# Altium PCB AMS.PcbDoc (part 2 of 3)
Units mm, origin at the board's own origin, x right, y up, seen from the top; angles counter-clockwise.
Board outline 150 x 60 mm, 4 copper layers (Top Layer, Layer 1, Layer 2, Bottom Layer), stack 0.603 mm thick; 208 components, 140 nets, 599 pads, 192 vias.
Unrouted connection lines stored in the file: 272.
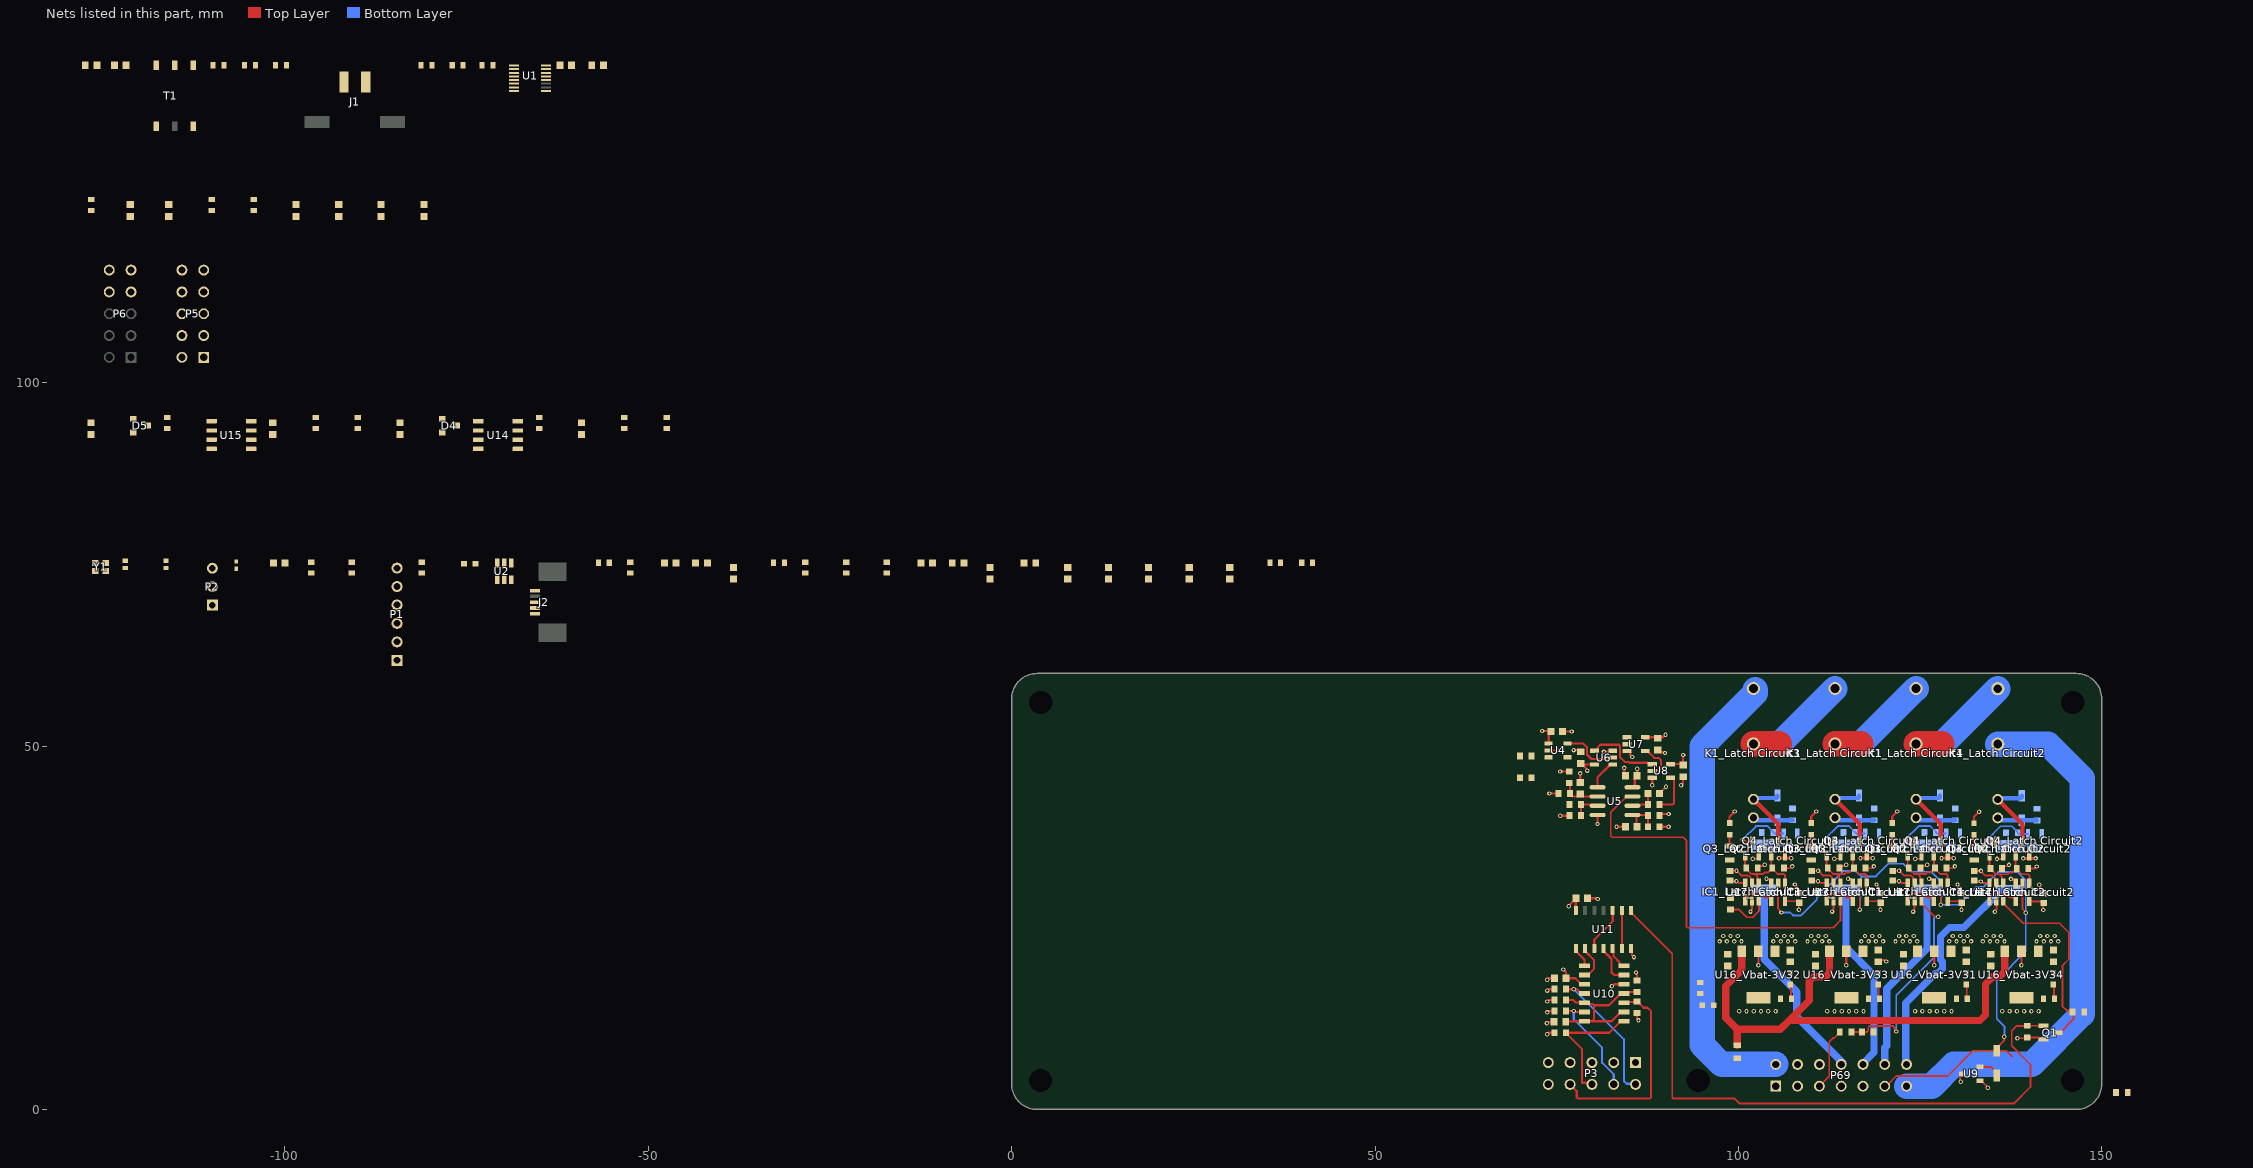
[diagram p3: the nets of this part, all layers, seen from the top]

## Part data
C1 C2 C3 C4 C5 C6 C7 C8 C9 C10 C11 C12 C13 C14 C15 C16 C17 C18 C19 C31 C32 C33 C34 C35 C36 C37 C38 C39 C40 C41_Vbat-3V31 C41_Vbat-3V32 C41_Vbat-3V33 C41_Vbat-3V34 C42_Vbat-3V31 C42_Vbat-3V32 C42_Vbat-3V33 C42_Vbat-3V34: library part Capacitor, "Capacitor", ComponentLink1Description="New link"
C20 C21 C22 C23 C24 C25 C26 C27 C28: "264-4630", LatestRevisionDate=17-Jul-2002, LatestRevisionNote="Re-released for DXP Platform.", PackageDescription="Radial Cap, Thru-Hole; 2 Leads; 0.3 in Pin Spacing", PackageReference=RAD-0.3, Published=8-Jun-2000, Publisher="Altium Limited"
"C43_Latch Circuit1" "C43_Latch Circuit2" "C43_Latch Circuit3" "C43_Latch Circuit4" "C44_Latch Circuit1" "C44_Latch Circuit2" "C44_Latch Circuit3" "C44_Latch Circuit4": library part CMP-2006-03300-2, "CAP CER 0.1UF 50V X7R 0603", Capacitance=100nF, Manufacturer=Kemet, Manufacturer Part Number=C0603X104K5RACTU, Package=C0603-CJ, Temperature="-55°C to +125°C", Temperature Characteristic=X7R, Temperature Coefficient=15%, Temperature Range High=+125°C, Temperature Range Low=-55°C, Tolerance=10%, Voltage=50V, Automotive=No, Category=Cap, ComponentLink2Description=Datasheet, ComponentLink2URL=https://content.kemet.com/datasheets/KEM_C1013_X7R_FT-CAP_SMD.pdf, Device Class L1="Passive Components", Device Class L2=Capacitors, Device Class L3="Ceramic Capacitors", Digikey Description="CAP CER 0.1UF 50V X7R 0603", Height=0.95mm, Ipc Land Pattern Name=CAPC16080X80, Lead Free=Yes, Material=Ceramic, Mouser Description="Capacitor; Ceramic; Cap 0.1uF; Tol+10%; SMT; Flexible Termination; Vol-Rtg 50V; TR", Octopart=https://octopart.com/c0603x104k5ractu-kemet-9145062, RoHS=TRUE, Voltage Rating=50V
D1: "LED BLUE DIFFUSED 0603 SMD", Case/Package=0603, Color=Blue, Forward Voltage=3.2V, Manufacturer="Wurth Electronics", Supplier Part Number 1=710-150060BS55040, Test Current=20mA, ComponentLink1Description=http://www.farnell.com/datasheets/2621640.pdf?src-supplier=Farnell, ComponentLink1URL=http://www.farnell.com/datasheets/2621640.pdf?src-supplier=Farnell, ComponentLink2Description=https://www.we-online.de/web/en/index.php/download/media/07_electronic_components/download_center_1/application_notes_berichte/ano002_leds___the_future_of_horticultural_lighting/ANO002b_EN_LEDs_The_Future_of_Horticultural_Lighting.pdf?src-supplier=Digi-Key, ComponentLink2URL=https://www.we-online.de/web/en/index.php/download/media/07_electronic_components/download_center_1/application_notes_berichte/ano002_leds___the_future_of_horticultural_lighting/ANO002b_EN_LEDs_The_Future_of_Horticultural_Lighting.pdf?src-supplier=Digi-Key, ComponentLink3Description=https://katalog.we-online.de/pbs/datasheet/150060BS55040.pdf?src-supplier=Digi-Key, ComponentLink3URL=https://katalog.we-online.de/pbs/datasheet/150060BS55040.pdf?src-supplier=Digi-Key, ComponentLink4Description=http://www.farnell.com/datasheets/2621640.pdf?src-supplier=Newark, ComponentLink4URL=http://www.farnell.com/datasheets/2621640.pdf?src-supplier=Newark, Dominant Wavelength=470nm, Height=0.5mm, Length=1.6mm, Lens Size=0.8mm, Lens Style=Flat, Lens Transparency=Diffused, Luminous Intensity=80mcd, Manufacturer Part Number=150060BS55040, Mount="Surface Mount", Packaging="Tape and Reel", Pricing 1="1=0.18000, 10=0.16800, 50=0.16800, 100=0.15200, 1000=0.12100, 10000=0.10600 (USD)", RoHS=No, RoHS Compliant=No, Supplier 1=Mouser, Viewing Angle=140°, Width=0.8mm
D2 "D7_Latch Circuit1" "D7_Latch Circuit2" "D7_Latch Circuit3" "D7_Latch Circuit4": library part 1N4148W-7-F, "DIODE GEN PURP 100V 300MA SOD123", Average Rectified Current=300mA, Capacitance=2pF, Current Rating=150mA, Forward Voltage=1.25V, Manufacturer 1=Diodes, Max Forward Surge Current (Ifsm)=2A, Max Operating Temperature=150°C, Max Repetitive Reverse Voltage (Vrrm)=100V, Min Operating Temperature=-65°C, Package Quantity=3000, Peak Reverse Current=1uA, Power Dissipation=400mW, Supplier Part Number 1=1N4148W-FDIDKR-ND, Voltage Rating (DC)=75V, ComponentLink1Description=https://datasheet.ciiva.com/911/ds30086-911734.pdf?src-supplier=Digi-Key, ComponentLink1URL=https://datasheet.ciiva.com/911/ds30086-911734.pdf?src-supplier=Digi-Key, ComponentLink2Description=https://datasheet.ciiva.com/911/ds30086-911735.pdf?src-supplier=Digi-Key, ComponentLink2URL=https://datasheet.ciiva.com/911/ds30086-911735.pdf?src-supplier=Digi-Key, ComponentLink3Description=https://datasheet.ciiva.com/911/ds30086-911736.pdf?src-supplier=Digi-Key, ComponentLink3URL=https://datasheet.ciiva.com/911/ds30086-911736.pdf?src-supplier=Digi-Key, ComponentLink4Description=https://datasheet.ciiva.com/8300/ds30086-8300392.pdf?src-supplier=Avnet, ComponentLink4URL=https://datasheet.ciiva.com/8300/ds30086-8300392.pdf?src-supplier=Avnet, ComponentLink5Description=https://datasheet.ciiva.com/25919/ds30086-25919609.pdf?src-supplier=Avnet+Europe, ComponentLink5URL=https://datasheet.ciiva.com/25919/ds30086-25919609.pdf?src-supplier=Avnet+Europe, ComponentLink6Description=https://datasheet.ciiva.com/22695/1915529-22695239.pdf?src-supplier=Element14, ComponentLink6URL=https://datasheet.ciiva.com/22695/1915529-22695239.pdf?src-supplier=Element14, ComponentLink7Description=https://datasheet.ciiva.com/1179/1915529-1179304.pdf?src-supplier=Element14, ComponentLink7URL=https://datasheet.ciiva.com/1179/1915529-1179304.pdf?src-supplier=Element14, ComponentLink8Description=https://datasheet.ciiva.com/4435/ds30086-4435128.pdf?src-supplier=Mouser, ComponentLink8URL=https://datasheet.ciiva.com/4435/ds30086-4435128.pdf?src-supplier=Mouser, ComponentLink9Description=https://datasheet.ciiva.com/15219/getdatasheetpartid-110030-15219548.pdf?src-supplier=Verical, ComponentLink9URL=https://datasheet.ciiva.com/15219/getdatasheetpartid-110030-15219548.pdf?src-supplier=Verical, ComponentLink10Description=https://datasheet.ciiva.com/8303/ds30086-8303197.pdf?src-supplier=Avnet, ComponentLink10URL=https://datasheet.ciiva.com/8303/ds30086-8303197.pdf?src-supplier=Avnet, Contact Plating=Tin,Matte, Element Configuration=Single, Forward Current=150mA, Height=1.25mm, Lead Free="Lead Free", Length=2.85mm, Manufacturer Part Number 1=1N4148W-7-F, Max Reverse Voltage (DC)=100V, Max Surge Current=2A, Mount="Surface Mount", Number of Pins=2, Output Current=150mA, Packaging="Tape and Reel", Peak Non-Repetitive Surge Current=2A, Polarity=Standard, Power Rating=400mW, Pricing 1="1=0.16000, 10=0.14600, 25=0.13880, 100=0.06110, 250=0.05868, 500=0.04800, 1000=0.03333 (USD)", Radiation Hardening=No, REACH SVHC="No SVHC", Recovery Time=4ns, Reverse Recovery Time=4ns, RoHS=Yes, Stock 1=3523690, Supplier 1=Digi-Key, Voltage=100V, Weight=0.000353oz, Width=1.7mm
D3 "D8_Latch Circuit1" "D8_Latch Circuit2" "D8_Latch Circuit3" "D8_Latch Circuit4": "LED RED DIFFUSED 0603 SMD", Case Code (Imperial)=0603, Case Code (Metric)=1608, Color=Red, Forward Voltage=2V, Manufacturer="Wurth Electronics", Supplier Part Number 1=710-150060SS55040, Test Current=20mA, Case/Package=0603, Category=LEDs, Dominant Wavelength=630nm, Height=0.5mm, Length=1.6mm, Lens Size=0.8mm, Lens Style=Flat, Lens Transparency=Diffused, Luminous Intensity=70mcd, Manufacturer Part Number=150060SS55040, Mount="Surface Mount", Packaging="Tape and Reel", Pricing 1="1=0.18000, 10=0.16800, 50=0.16800, 100=0.15200, 1000=0.12100, 10000=0.10600 (USD)", RoHS=No, RoHS Compliant=No, Stock 1=17006, Supplier 1=Mouser, Viewing Angle=140°, Width=0.8mm
D4 D5: library part CMP-07200-000005-1, "TVS DIODE 32V 66V SOT23-3", Breakdown Voltage=35.6V, Capacitance=30pF, Clamping Voltage=66V, Manufacturer="ON Semiconductor", Max Junction Temp=+150°C, Package=318-08, Peak Pulse Current=8A, Peak Pulse Power=350W, Reverse Standoff Voltage=32V, Temperature="-55°C to +150°C", Temperature Range Low=-55°C, Automotive=Yes, Automotive Grade="Grade 0", Category=Diode, ComponentLink2Description=Datasheet, ComponentLink2URL=https://www.onsemi.com/pub/Collateral/NUP3105L-D.PDF, Device Class L1="Circuit Protection", Device Class L2="TVS Diodes", Device Class L3=unset, Digikey Description="TVS DIODE 32V 66V SOT23-3", Direction=Bidirectional, Footprint Url=https://www.onsemi.com/pub/Collateral/318-08.PDF, Height=1.11mm, Lead Free=Yes, Manufacturer Part Number=SZNUP3105LT3G, Mouser Description="32V Dual Line CAN Bus Protector in SOT-23 AEC-Q 24 V CAN Bus Protector in SOT-23", Number of Channels=2, Octopart=https://octopart.com/sznup3105lt3g-on+semiconductor-54318507, RoHS=TRUE, Standoff Height=0.01mm, Temperature Range High=+150°C
D6_Vbat-3V31 D6_Vbat-3V32 D6_Vbat-3V33 D6_Vbat-3V34: "LED GREEN DIFFUSED 0603 SMD", Case Code (Imperial)=0603, Case Code (Metric)=1608, Color=Green, Forward Voltage=3.2V, Manufacturer="Wurth Electronics", Supplier Part Number 1=710-150060GS55040, Test Current=20mA, Case/Package=0603, Category=LEDs, ComponentLink1Description=http://www.farnell.com/datasheets/2621642.pdf?src-supplier=Farnell, ComponentLink1URL=http://www.farnell.com/datasheets/2621642.pdf?src-supplier=Farnell, ComponentLink2Description=http://katalog.we-online.de/pbs/datasheet/150060GS55040.pdf?src-supplier=Digi-Key, ComponentLink2URL=http://katalog.we-online.de/pbs/datasheet/150060GS55040.pdf?src-supplier=Digi-Key, ComponentLink3Description=https://www.we-online.de/web/en/index.php/download/media/07_electronic_components/download_center_1/application_notes_berichte/ano002_leds___the_future_of_horticultural_lighting/ANO002b_EN_LEDs_The_Future_of_Horticultural_Lighting.pdf?src-supplier=Digi-Key, ComponentLink3URL=https://www.we-online.de/web/en/index.php/download/media/07_electronic_components/download_center_1/application_notes_berichte/ano002_leds___the_future_of_horticultural_lighting/ANO002b_EN_LEDs_The_Future_of_Horticultural_Lighting.pdf?src-supplier=Digi-Key, ComponentLink4Description=https://katalog.we-online.de/pbs/datasheet/150060GS55040.pdf?src-supplier=Digi-Key, ComponentLink4URL=https://katalog.we-online.de/pbs/datasheet/150060GS55040.pdf?src-supplier=Digi-Key, ComponentLink5Description=http://www.farnell.com/datasheets/2621642.pdf?src-supplier=Newark, ComponentLink5URL=http://www.farnell.com/datasheets/2621642.pdf?src-supplier=Newark, Dominant Wavelength=525nm, Height=0.5mm, Length=1.6mm, Lens Size=0.8mm, Lens Style=Flat, Lens Transparency=Diffused, Luminous Intensity=430mcd, Manufacturer Part Number=150060GS55040, Mount="Surface Mount", Packaging="Cut Tape", Pricing 1="1=0.23000, 10=0.21000, 50=0.21000, 100=0.19000, 1000=0.15200, 10000=0.13200 (USD)", RoHS=No, RoHS Compliant=No, Stock 1=3998, Supplier 1=Mouser, Viewing Angle=140°, Width=0.8mm
F1: "Surface Mount Fuses 32V .500A Case 0603 Protector Slim"
"IC1_Latch Circuit1" "IC1_Latch Circuit2" "IC1_Latch Circuit3" "IC1_Latch Circuit4": "Integrated Circuit", Manufacturer_Name="Texas Instruments", Datasheet Link=http://www.ti.com/general/docs/suppproductinfo.tsp?distId=10&gotoUrl=http%3A%2F%2Fwww.ti.com%2Flit%2Fgpn%2Fsn74lvc1g373, Height=1.45mm, Manufacturer_Part_Number=74LVC1G373DBVRE4
J1: "CONN HEADER 3MM 2POS R/A TIN SMD", Package=None, Availability=Unavailable, MF="{'manufacturer': u'TE Connectivity'}", MP=2-1445057-2, Price=None
J2: library part CMP-2000-07376-1, "Mini-B Connector, SMT Mount Receptacle Meeting Requirement of USB 2.0 Standard, 5 V, 1 A, -30 to 75 degC, 5-Pin SMD, RoHS, Tape and Reel", Current Rating (Max)=1A, Manufacturer="Hirose Electric", Operating Temp Range=-30Cto75C, Operating Temperature Max Deg. C=75C, Operating Temperature Min Deg. C=-30C, Package Description="5-Pin Surface Mount Device, Body 7.7 x 7 mm, Pitch 0.8 mm", Voltage Rating Max=5VAC, Body Orientation=RightAngle, Contact Material=CopperAlloy, Contact Plating=Gold, Datasheet URL=https://datasheet.ciiva.com/4598/e24000153-34949-4598883.pdf, Datasheet Version=04/2008, DELETED=Compliant, Gender=RCP, Housing Material=Synthetic, Manufacturer URL=https://www.hirose.com, Mounting Style=ThroughHole, Mounting Technology=SurfaceMount, Number of Contacts=5POS, Number of Ports=1Port, Number of Terminals=5, Package Reference=UX60SC-MB-5ST(80), Packaging=TapeandReel, Pitch (mm)=0.8mm, Product Depth (mm)=7mm, Product Diameter (mm)=NotRequiredmm, Product Height (mm)=3.95mm, Product Length (mm)=7.7mm, Termination Method=Solder, Type=Mini-USB
"K1_Latch Circuit1" "K1_Latch Circuit2" "K1_Latch Circuit3" "K1_Latch Circuit4": "Relay"
P1: library part "Header 6", "Header, 6-Pin", LatestRevisionDate=17-Jul-2002, LatestRevisionNote="Re-released for DXP Platform.", Publisher="Altium Limited"
P2: library part "Header 3", "Header, 3-Pin", Manufacturer=-, Mfg No.=-, Notes=-, Suppl. Link/No.=-, Supplier=Digikey
P3 P5 P6: "Connector", Manufacturer_Name="TE Connectivity", Mouser Part Number=571-4-794632-0, Datasheet Link=https://www.mouser.com/ProductDetail/TE-Connectivity-AMP/4-794632-0?qs=Rd%252BN518myCyGOpGRvqIhCg%3D%3D, Height=9.44mm, Manufacturer_Part_Number=4-794632-0, Mouser Price/Stock=https://www.mouser.co.uk/ProductDetail/TE-Connectivity-AMP/4-794632-0?qs=Rd%252BN518myCyGOpGRvqIhCg%3D%3D
P69: "Micro MATE-N-LOK, Rectangular Power Connectors, Header, Plug, Wire-to-Board, 14 Position"
Q1 "Q2_Latch Circuit1" "Q2_Latch Circuit2" "Q2_Latch Circuit3" "Q2_Latch Circuit4" "Q3_Latch Circuit1" "Q3_Latch Circuit2" "Q3_Latch Circuit3" "Q3_Latch Circuit4" "Q4_Latch Circuit1" "Q4_Latch Circuit2" "Q4_Latch Circuit3" "Q4_Latch Circuit4": library part CMP-1259-00087-1, "N-Channel Trench MOSFET, 60 V, 0.36 A, -55 to 150 degC, 3-Pin SOT23, Tape and Reel", Manufacturer="NXP Semiconductors", Automotive Qualified=Y, Channel Type=N, Code_JEDEC=TO-236AB, ComponentLink1Description="Manufacturer URL", ComponentLink1URL=http://www.nxp.com/, ComponentLink2Description=Datasheet, ComponentLink2URL=http://www.nxp.com/documents/data_sheet/BSS138BK.pdf, ComponentLink3Description="Package Specification", ComponentLink3URL=http://www.nxp.com/documents/outline_drawing/sot023_po.pdf, DatasheetVersion="Rev. 1", ID [max] (A)=0.36, IDM [max] (A)=1.2, Mounting Technology="Surface Mount", PackageDescription="3-Pin Small Outline Transistor Package, Body 2.9 x 1.3 mm, Pitch 0.95 mm", PackageReference=SOT23, PackageVersion="06-03-16, 03/2006", Packing="Tape & Reel", PartNumber=BSS138BK,215, VDS [max] (V)=60, VGSth [typ] (V)=1.1
R3 R5 R6: library part Resistor, "Resistor"
R4: "RB2"
R7 R8 R9 R10 R11 R12 R13 R14: library part Resistor, "Voltage divider"
R19 R24: "CRCW06033K24FKEA", LatestRevisionDate=17-Jul-2002, LatestRevisionNote="Re-released for DXP Platform.", PackageDescription="Axial Device, Thru-Hole; 2 Leads; 0.3 in Pin Spacing", PackageReference=AXIAL-0.3, Published=8-Jun-2000, Publisher="Altium Limited"
R20 R21 R22 R23 R26: "169-4216", LatestRevisionDate=17-Jul-2002, LatestRevisionNote="Re-released for DXP Platform.", PackageDescription="Axial Device, Thru-Hole; 2 Leads; 0.3 in Pin Spacing", PackageReference=AXIAL-0.3, Published=8-Jun-2000, Publisher="Altium Limited"
R25: "120-842", LatestRevisionDate=17-Jul-2002, LatestRevisionNote="Re-released for DXP Platform.", PackageDescription="Axial Device, Thru-Hole; 2 Leads; 0.3 in Pin Spacing", PackageReference=AXIAL-0.3, Published=8-Jun-2000, Publisher="Altium Limited"
R27 R28 R30: "679-0260", LatestRevisionDate=17-Jul-2002, LatestRevisionNote="Re-released for DXP Platform.", PackageDescription="Axial Device, Thru-Hole; 2 Leads; 0.3 in Pin Spacing", PackageReference=AXIAL-0.3, Published=8-Jun-2000, Publisher="Altium Limited"
R29 R31 R32 R37 R38 "R51_Latch Circuit1" "R51_Latch Circuit2" "R51_Latch Circuit3" "R51_Latch Circuit4" "R52_Latch Circuit1" "R52_Latch Circuit2" "R52_Latch Circuit3" "R52_Latch Circuit4" "R53_Latch Circuit1" "R53_Latch Circuit2" "R53_Latch Circuit3" "R53_Latch Circuit4" "R54_Latch Circuit1" "R54_Latch Circuit2" "R54_Latch Circuit3" "R54_Latch Circuit4" R?: library part RC0805JR-0710KL, "10k E0805 1% 1/8W", Case Code (Imperial)=0805, Case Code (Metric)=2012, Max Operating Temperature=155°C, Min Operating Temperature=-55°C, Power Rating=125mW, Resistance=10kR, Supplier Part Number 1=311-10KARCT-ND, Temperature Coefficient=100ppm/°C, Tolerance=5%, Voltage Rating=150V, Case/Package=0805, ComponentLink1Description=https://datasheet.ciiva.com/7941/444164-7941870.pdf?src-supplier=Element14, ComponentLink1URL=https://datasheet.ciiva.com/7941/444164-7941870.pdf?src-supplier=Element14, ComponentLink2Description=https://datasheet.ciiva.com/7941/444164-7941871.pdf?src-supplier=Element14, ComponentLink2URL=https://datasheet.ciiva.com/7941/444164-7941871.pdf?src-supplier=Element14, ComponentLink3Description=https://datasheet.ciiva.com/7983/444164-7983765.pdf?src-supplier=Element14, ComponentLink3URL=https://datasheet.ciiva.com/7983/444164-7983765.pdf?src-supplier=Element14, Composition="Thick Film", Contact Plating=Tin, Depth=1.25mm, Height=0.5mm, Lead Free="Lead Free", Length=2mm, Military Standard=Not, Packaging="Tape and Reel", Radiation Hardening=No, REACH SVHC=Unknown, RoHS=Yes, Supplier 1=Digi-Key, Termination=SMD/SMT, Width=1.25mm
R33 R34 R35 R36: library part RC0805FR-071K58L, "1.58k 0805 1% 1/8W", Case Code (Imperial)=0805, Case Code (Metric)=2012, Max Operating Temperature=155°C, Max Power Dissipation=125mW, Min Operating Temperature=-55°C, Package Quantity=1, Resistance=1.58kR, Supplier Part Number 1=311-1.58KCRCT-ND, Temperature Coefficient=100ppm/°C, Tolerance=1%, Voltage Rating=150V, Case/Package=0805, ComponentLink1Description=https://datasheet.ciiva.com/2457/pyu-r-int-thick-7-2457440.pdf?src-supplier=Digi-Key, ComponentLink1URL=https://datasheet.ciiva.com/2457/pyu-r-int-thick-7-2457440.pdf?src-supplier=Digi-Key, ComponentLink2Description=https://datasheet.ciiva.com/2457/pyu-r-int-thick-7-2457441.pdf?src-supplier=Digi-Key, ComponentLink2URL=https://datasheet.ciiva.com/2457/pyu-r-int-thick-7-2457441.pdf?src-supplier=Digi-Key, ComponentLink3Description=https://datasheet.ciiva.com/2457/pyu-r-int-thick-7-2457442.pdf?src-supplier=Digi-Key, ComponentLink3URL=https://datasheet.ciiva.com/2457/pyu-r-int-thick-7-2457442.pdf?src-supplier=Digi-Key, ComponentLink4Description=https://datasheet.ciiva.com/17082/rc0805-17082718.pdf?src-supplier=Future+Electronics, ComponentLink4URL=https://datasheet.ciiva.com/17082/rc0805-17082718.pdf?src-supplier=Future+Electronics, Composition="Thick Film", Contact Plating=Tin, Depth=1.25mm, Features="Moisture Resistant", Height=0.024inch, Lead Free="Lead Free", Length=0.079inch, Military Standard=Not, Number of Terminations=2, Packaging="Tape and Reel", Power Rating=125mW, Radiation Hardening=No, RoHS=Yes, Supplier 1=Digi-Key, Termination=SMD/SMT, Voltage Rating (DC)=150V, Width=0.049inch
"R55_Latch Circuit1" "R55_Latch Circuit2" "R55_Latch Circuit3" "R55_Latch Circuit4": library part CRCW2512649RFKEG, "RES SMD 649 OHM 1% 1W 2512", Case Code (Imperial)=2512, Case Code (Metric)=6432, Manufacturer 1="Vishay Dale", Max Operating Temperature=155°C, Max Power Dissipation=1W, Min Operating Temperature=-55°C, Package Quantity=10, Resistance=649R, Supplier Part Number 1=541-649AFCT-ND, Temperature Coefficient=100ppm/°C, Tolerance=1%, Voltage Rating (DC)=500V, Case/Package=2512, ComponentLink1Description=https://datasheet.ciiva.com/2479/dcrcwe3-2479296.pdf?src-supplier=Digi-Key, ComponentLink1URL=https://datasheet.ciiva.com/2479/dcrcwe3-2479296.pdf?src-supplier=Digi-Key, ComponentLink2Description=https://datasheet.ciiva.com/2479/dcrcwe3-2479297.pdf?src-supplier=Digi-Key, ComponentLink2URL=https://datasheet.ciiva.com/2479/dcrcwe3-2479297.pdf?src-supplier=Digi-Key, ComponentLink3Description=https://datasheet.ciiva.com/2479/dcrcwe3-2479298.pdf?src-supplier=Digi-Key, ComponentLink3URL=https://datasheet.ciiva.com/2479/dcrcwe3-2479298.pdf?src-supplier=Digi-Key, Composition="Thick Film", Features="Automotive AEC-Q200", Height=0.028inch, Lead Free="Lead Free", Length=0.248inch, Manufacturer Part Number 1=CRCW2512649RFKEG, Number of Terminations=2, Packaging="Tape and Reel", Pricing 1="1=0.38000, 10=0.31800, 100=0.12420, 1000=0.05198 (USD)", RoHS=Yes, Stock 1=2166, Supplier 1=Digi-Key, Width=0.124inch
"R56_Latch Circuit1" "R56_Latch Circuit2" "R56_Latch Circuit3" "R56_Latch Circuit4": "RES SMD 649 OHM 1% 1W 2512", Case Code (Imperial)=2512, Case Code (Metric)=6432, Manufacturer 1="Vishay Dale", Max Operating Temperature=155°C, Max Power Dissipation=1W, Min Operating Temperature=-55°C, Package Quantity=10, Resistance=649R, Supplier Part Number 1=541-649AFCT-ND, Temperature Coefficient=100ppm/°C, Tolerance=1%, Voltage Rating (DC)=500V, Case/Package=2512, ComponentLink1Description=https://datasheet.ciiva.com/2479/dcrcwe3-2479296.pdf?src-supplier=Digi-Key, ComponentLink1URL=https://datasheet.ciiva.com/2479/dcrcwe3-2479296.pdf?src-supplier=Digi-Key, ComponentLink2Description=https://datasheet.ciiva.com/2479/dcrcwe3-2479297.pdf?src-supplier=Digi-Key, ComponentLink2URL=https://datasheet.ciiva.com/2479/dcrcwe3-2479297.pdf?src-supplier=Digi-Key, ComponentLink3Description=https://datasheet.ciiva.com/2479/dcrcwe3-2479298.pdf?src-supplier=Digi-Key, ComponentLink3URL=https://datasheet.ciiva.com/2479/dcrcwe3-2479298.pdf?src-supplier=Digi-Key, Composition="Thick Film", Features="Automotive AEC-Q200", Height=0.028inch, Lead Free="Lead Free", Length=0.248inch, Manufacturer Part Number 1=CRCW2512649RFKEG, Number of Terminations=2, Packaging="Tape and Reel", Pricing 1="1=0.38000, 10=0.31800, 100=0.12420, 1000=0.05198 (USD)", RoHS=Yes, Stock 1=2166, Supplier 1=Digi-Key, Width=0.124inch
T1: "BMS XFORMER 1-CH 1000V AECQ +125", Inductance=150uH, Manufacturer=Bourns, Max Operating Temperature=125°C, Min Operating Temperature=-40°C, Supplier Part Number 1=1802382, Category=Transformers, ComponentLink1Description=https://www.bourns.com/docs/Product-Datasheets/SM91502AL.pdf?src-supplier=Digi-Key, ComponentLink1URL=https://www.bourns.com/docs/Product-Datasheets/SM91502AL.pdf?src-supplier=Digi-Key, Manufacturer Part Number=SM91502ALE, Mount="Surface Mount", Packaging="Cut Tape", Pricing 1="800=2.35100 (USD)", RoHS=Yes, Stock 1=1, Supplier 1=RSComponents, Turns Ratio=1:1
U1: "IC COMM INTERFACE ISOSPI 16MSOP", Case/Package=MSOP, Manufacturer="Analog Devices / Linear Technology", Max Operating Temperature=125°C, Max Supply Voltage=5.5V, Min Operating Temperature=-40°C, Min Supply Voltage=2.7V, Package=None, Package Quantity=37, Supplier Part Number 1=584-LTC6820HMS#PBF, Availability=Unavailable, Category="Interface ICs", ComponentLink1Description=https://datasheet.ciiva.com/22649/1730562-22649441.pdf?src-supplier=Element14, ComponentLink1URL=https://datasheet.ciiva.com/22649/1730562-22649441.pdf?src-supplier=Element14, ComponentLink2Description=https://datasheet.ciiva.com/6573/42317-6573703.pdf?src-supplier=Digi-Key, ComponentLink2URL=https://datasheet.ciiva.com/6573/42317-6573703.pdf?src-supplier=Digi-Key, ComponentLink3Description=https://datasheet.ciiva.com/22767/1730562-22767675.pdf?src-supplier=Farnell, ComponentLink3URL=https://datasheet.ciiva.com/22767/1730562-22767675.pdf?src-supplier=Farnell, Interface=SPI, Manufacturer Part Number=LTC6820HMS#PBF, MF="{'manufacturer': u'Analog Devices Inc.'}", MP=LTC6820HMS#PBF, Number of Pins=16, Packaging=Rail/Tube, Price=None, Pricing 1="1=6.860000, 10=6.160000, 25=5.820000, 50=5.820000, 100=5.040000, 1000=4.780000, 10000=4.780000 (USD)", REACH SVHC="No SVHC", RoHS=Yes, RoHS Compliant=Yes, Series=isoSPI, Supplier 1=Mouser
U2: "TVS DIODE 5.25V 17V SOT23-6", Breakdown Voltage=6V, Capacitance=3.5pF, Case/Package=SOT-23, Clamping Voltage=17V, Leakage Current=150nA, Manufacturer=STMicroelectronics, Max Operating Temperature=125°C, Min Operating Temperature=-40°C, Operating Supply Voltage=1.1V, Package Quantity=3000, Peak Pulse Current=5A, Power Line Protection=Yes, Reverse Standoff Voltage=5.25V, Supplier Part Number 1=6247693, Test Current=1mA, Working Voltage=5V, Category="TVS Diodes", Clamping Voltage-Max=17V, ComponentLink1Description=https://datasheet.ciiva.com/1268/1690354-1268384.pdf?src-supplier=Element14, ComponentLink1URL=https://datasheet.ciiva.com/1268/1690354-1268384.pdf?src-supplier=Element14, ComponentLink2Description=https://datasheet.ciiva.com/4508/cd00050750-113117-4508433.pdf?src-supplier=Mouser, ComponentLink2URL=https://datasheet.ciiva.com/4508/cd00050750-113117-4508433.pdf?src-supplier=Mouser, ComponentLink3Description=https://datasheet.ciiva.com/15143/getdatasheetpartid-148465-15143789.pdf?src-supplier=Verical, ComponentLink3URL=https://datasheet.ciiva.com/15143/getdatasheetpartid-148465-15143789.pdf?src-supplier=Verical, ComponentLink4Description=https://datasheet.ciiva.com/26787/usblc6-2sc6-26787908.pdf?src-supplier=IIIC, ComponentLink4URL=https://datasheet.ciiva.com/26787/usblc6-2sc6-26787908.pdf?src-supplier=IIIC, ComponentLink5Description=https://datasheet.ciiva.com/16200/cd00050750-16200026.pdf?src-supplier=Future+Electronics, ComponentLink5URL=https://datasheet.ciiva.com/16200/cd00050750-16200026.pdf?src-supplier=Future+Electronics, ComponentLink6Description=https://datasheet.ciiva.com/41444/001184109-da-01-en-ic-esd-protecti-usblc6-2sc6-sot-23-6-stm-41444156.pdf?src-supplier=Conrad, ComponentLink6URL=https://datasheet.ciiva.com/41444/001184109-da-01-en-ic-esd-protecti-usblc6-2sc6-sot-23-6-stm-41444156.pdf?src-supplier=Conrad, Contact Plating=Tin,Matte, Data Rate=480Mbps, Depth=1.75mm, Direction=Unidirectional,Bidirectional, Element Configuration=Dual, ESD Protection=Yes, Height=1.3mm, Lead Free="Lead Free", Length=3.05mm, Manufacturer Part Number=USBLC6-2SC6, Max Breakdown Voltage=6V, Max Reverse Leakage Current=150nA, Min Breakdown Voltage=6V, Mount="Surface Mount", Number of Bidirectional Channels=2, Number of Channels=2, Number of Elements=1, Number of Pins=6, Packaging="Tape and Reel", Polarity=Unidirectional,Bidirectional, Pricing 1="10=0.61400, 50=0.57700, 100=0.54700, 250=0.51600, 500=0.49000 (USD)", Radiation Hardening=No, REACH SVHC="No SVHC", Reverse Breakdown Voltage=6V, RoHS=Yes, RoHS Compliant=Yes, Series=USB, Stock 1=1, Supplier 1=RSComponents, Termination=SMD/SMT, Width=1.75mm
U4: library part CMP-04872-000003-1, "IC RECEIVER 0/1 SOT23-5", Ambient Temperature Range High=+85°C, Ambient Temperature Range Low=-40°C, Manufacturer="Texas Instruments", Max Supply Voltage=3.6V, Min Supply Voltage=2.4V, Nominal Supply Current=2-5.5mA, Package=DBV0005A, Temperature="-40°C to +85°C", Automotive=No, Category=IC, ComponentLink2Description=Datasheet, ComponentLink2URL=http://www.ti.com/lit/ds/symlink/sn65lvdt2.pdf, Device Class L1="Integrated Circuits (ICs)", Device Class L2="Interface ICs", Device Class L3=unset, Digikey Description="IC RECEIVER 0/1 SOT23-5", Height=1.45mm, Interface=LVDS,LVTTL, Lead Free=Yes, Manufacturer Part Number=SN65LVDT2DBVT, Mouser Description="LVDS Interface IC Dual LVDS", Octopart=https://octopart.com/sn65lvdt2dbvt-texas+instruments-712102, RoHS=TRUE, Standoff Height=0mm, Temperature Range High=+85°C, Temperature Range Low=-40°C
U5: library part CMP-0187-00180-2, "Push-Pull Output Sub-Microamp Comparator, 8-Pin SOIC, Industrial Temperature", Code_IPC=SOIC127P600-8, Code_JEDEC=MS-012, ComponentLink1Description="Manufacturer URL", ComponentLink1URL=http://www.microchip.com/, ComponentLink2Description=Datasheet, ComponentLink2URL=http://ww1.microchip.com/downloads/en/DeviceDoc/21696H.pdf, ComponentLink3Description="Package Specification", ComponentLink3URL=http://www.microchip.com/stellent/groups/techpub_sg/documents/packagingspec/en012702.pdf, DatasheetVersion="revH, Dec-2011", PackageDescription="8-Lead Plastic Small Outline (SN) - Narrow, 3.90mm Body [SOIC]", PackageReference=SOIC-SN8, PackageVersion="revBB, Aug-2009", RevisionNote="URLs added. DatasheetVersion updated."
U6: "Integrated Circuit", Manufacturer_Name="Texas Instruments", Mouser2 Part Number=595-SN74LVC08MDBVREP, Datasheet Link=http://www.ti.com/lit/gpn/sn74lvc1g08-ep, Height=1.45mm, Manufacturer_Part_Number=SN74LVC1G08MDBVREP, Mouser2 Price/Stock=https://www.mouser.com/Search/Refine.aspx?Keyword=595-SN74LVC08MDBVREP
U7: library part NC7S02M5X, "NAND GATEEE", Manufacturer_Name="ON Semiconductor", Height=1.25mm, Manufacturer_Part_Number=NC7S02M5X
U8 "U17_Latch Circuit1" "U17_Latch Circuit2" "U17_Latch Circuit3" "U17_Latch Circuit4": "OR GATEEEE", Manufacturer_Name="ON Semiconductor", Datasheet Link=https://componentsearchengine.com/Datasheets/2/NC7S32M5X.pdf, Height=1.1mm, Manufacturer_Part_Number=NC7S32M5X
U9: library part MAX810TTRG, "Integrated Circuit", Manufacturer_Name="ON Semiconductor", Datasheet Link=http://www.onsemi.com/pub/Collateral/MAX809S-D.PDF, Height=1.11mm, Manufacturer_Part_Number=MAX810TTRG
U10: "IC VOLT COMPARATOR QUAD 14-SOIC", Case/Package=SOIC, Input Bias Current=5pA, Input Offset Voltage (Vos)=5mV, Manufacturer 1="Texas Instruments", Max Operating Temperature=125°C, Max Power Dissipation=950mW, Max Supply Current=80uA, Max Supply Voltage=16V, Min Operating Temperature=-40°C, Min Supply Voltage=3V, Operating Supply Voltage=5V, Output Current=20mA, Package Quantity=2500, Power Supply Rejection Ratio (PSRR)=85dB, Quiescent Current=175uA, Supplier Part Number 1=296-23711-1-ND, Common Mode Rejection Ratio=84dB, ComponentLink1Description=https://datasheet.ciiva.com/1828/tlc3704-q1-1828544.pdf?src-supplier=Digi-Key, ComponentLink1URL=https://datasheet.ciiva.com/1828/tlc3704-q1-1828544.pdf?src-supplier=Digi-Key, ComponentLink2Description=https://datasheet.ciiva.com/4464/sgls191a-104586-4464808.pdf?src-supplier=Mouser, ComponentLink2URL=https://datasheet.ciiva.com/4464/sgls191a-104586-4464808.pdf?src-supplier=Mouser, ComponentLink3Description=https://datasheet.ciiva.com/15131/getdatasheetpartid-331461-15131244.pdf?src-supplier=Verical, ComponentLink3URL=https://datasheet.ciiva.com/15131/getdatasheetpartid-331461-15131244.pdf?src-supplier=Verical, ComponentLink4Description=https://datasheet.ciiva.com/14391/tlc3704-q1-14391948.pdf?src-supplier=Avnet, ComponentLink4URL=https://datasheet.ciiva.com/14391/tlc3704-q1-14391948.pdf?src-supplier=Avnet, ComponentLink5Description=https://datasheet.ciiva.com/1828/tlc3704-q1-1828542.pdf?src-supplier=Digi-Key, ComponentLink5URL=https://datasheet.ciiva.com/1828/tlc3704-q1-1828542.pdf?src-supplier=Digi-Key, ComponentLink6Description=https://datasheet.ciiva.com/1828/tlc3704-q1-1828543.pdf?src-supplier=Digi-Key, ComponentLink6URL=https://datasheet.ciiva.com/1828/tlc3704-q1-1828543.pdf?src-supplier=Digi-Key, Contact Plating=Gold, Lead Free="Lead Free", Manufacturer Part Number 1=TLC3704QDRG4Q1, Max Input Current=5pA, Mount="Surface Mount", Nominal Supply Current=80uA, Number of Bits=4, Number of Channels=4, Number of Elements=4, Number of Pins=14, Output Type=TTL, Packaging="Tape and Reel", Power Dissipation=950mW, Pricing 1="1=1.68000, 10=1.50700, 100=1.21100, 500=0.99498, 1000=0.82441 (USD)", Propagation Delay=4.5us, Radiation Hardening=No, Response Time=0.3us, RoHS=Yes, Stock 1=3794, Supplier 1=Digi-Key, Type="General Purpose", Weight=0.004318oz
U11: library part CMP-0781-00002-4, "Quadruple Positive-OR Gates With Schmitt-Trigger Inputs, D0014A, TUBE", F @ Nom Voltage(Max)(Mhz)=70, Generic Part Number=SN74HC7032, ICC @ Nom Voltage(Max)(mA)=0.02, Manufacturer="Texas Instruments", Operating Temperature Range(C)="-40 to 85", Rating=Catalog, tpd @ Nom Voltage(Max)(ns)=33, Voltage(Nom)(V)=5, Bits(#)=4, Code_JEDEC=MS-012, DatasheetVersion=SCLS036E, Input Type=CMOS, Output Drive (IOL/IOH)(Max)(mA)=5.2/-5.2, Output Type=CMOS, PackageReference=D0014A, PackageVersion=http://www.ti.com/lit/ml/mpds177g/mpds177g.pdf, VCC(Max)(V)=6, VCC(Min)(V)=2
U14 U15: library part CMP-0315-00036-2, "3.3V CAN Transceiver with Standby Mode, Loop-back, 6 mA, -40 to 125 degC, 8-pin SOIC (D), Green (RoHS & no Sb/Br)", Bus Fault Voltage(V)=+/-30, Drivers Per Package=1, Low Power Mode=Standby, Manufacturer="Texas Instruments", Rating=Catalog, Supply Voltage(s)(V)=3.3, Code_JEDEC=MS-012AA, ComponentLink1Description=Datasheet, ComponentLink1URL=http://www.ti.com/general/docs/lit/getliterature.tsp?genericPartNumber=SN65HVD233&fileType=pdf, DatasheetVersion=SLLS557F, Eco-Plan="Green (RoHS & no Sb/Br)", Features="Loop Back", ICC(Max)(mA)=6, Isolated=No, Mounting Technology="Surface Mount", PackageDescription="8-Pin Plastic Small Outline Integrated Circuit, 4.9 x 3.9 mm, Pitch 1.27 mm Pitch", PackageReference=D0008A, PackageVersion="revM, Jun-2011", PartNumber=SN65HVD233D, Receivers Per Package=1, SubFamily=CAN, Transient Pulse Protection(V)="-100 to 100"
U16_Vbat-3V31 U16_Vbat-3V32 U16_Vbat-3V33 U16_Vbat-3V34: "Standard Regulator Pos 3.3V 0.2A 4-Pin(3+Tab) SOT-223 T/R", Case/Package=SOT-223, Manufacturer="Diodes Zetex", Max Input Voltage=20V, Max Operating Temperature=125°C, Max Output Current=200mA, Max Power Dissipation=2W, Min Input Voltage=5.3V, Min Operating Temperature=-55°C, Output Voltage=3.3V, Output Voltage Accuracy=2.5%, Package Quantity=1000, Power Supply Rejection Ratio (PSRR)=64dB, Quiescent Current=600uA, Accuracy=2.5%, Category="Voltage Regulators - Linear", ComponentLink1Description=https://datasheet.ciiva.com/4882/zsr-91730-4882775.pdf?src-supplier=Mouser, ComponentLink1URL=https://datasheet.ciiva.com/4882/zsr-91730-4882775.pdf?src-supplier=Mouser, ComponentLink2Description=https://datasheet.ciiva.com/8240/zsr-8240251.pdf?src-supplier=Avnet, ComponentLink2URL=https://datasheet.ciiva.com/8240/zsr-8240251.pdf?src-supplier=Avnet, Height=1.65mm, Lead Free="Lead Free", Length=6.7mm, Manufacturer Part Number=ZSR330GTA, Mount="Surface Mount", Number of Outputs=1, Number of Regulators=1, Output Current=200mA, Output Type=Fixed, Packaging="Tape and Reel", Polarity=Positive, Power Dissipation=2W, Power Rating=2W, Pricing 1="5=1.13900, 25=0.99200, 50=0.94200, 250=0.74500, 500=0.66700, 5=0.82000, 25=0.71400, 50=0.67800, 250=0.53600, 500=0.48000 (USD)", Radiation Hardening=No, REACH SVHC="No SVHC", Reference Voltage=3.3V, RoHS=No, Stock 1=90, Supplier 1=RSComponents, Tolerance=2.5%, Weight=0.000282oz, Width=3.7mm
Y1: "Crystals AEC-Q200 26000kHz 8pF 2x1.6mm"
C29 C30: LatestRevisionDate=17-Jul-2002, LatestRevisionNote="Re-released for DXP Platform.", PackageDescription="Radial Cap, Thru-Hole; 2 Leads; 0.3 in Pin Spacing", PackageReference=RAD-0.3, Published=8-Jun-2000, Publisher="Altium Limited"

## Via types
v1: diameter 0.6, hole 0.3, Top Layer to Bottom Layer, 192 vias

## Nets (pads, with @x,y where several pads share a name; then routed paths per layer and width w, separated by ;. In a path a pad name is that pad's centre, name@x,y a point inside that pad or via, vN(x,y) a via of type N, cw(c..) or ccw(c..) an arc to the next point about the centre after c; other vN are vias at no path point)
3V3-BMS: "C43_Latch Circuit3.2" "C44_Latch Circuit3.2" "IC1_Latch Circuit3.5" "R54_Latch Circuit3.2" "U17_Latch Circuit3.5" C3.2 C4.2 C10.2 C11.2 C13.2 C14.2 C16.2 C17.2 C18.2 C37.2 C38.2 C42_Vbat-3V32.2 D6_Vbat-3V32.2 P1.1 P69.9 R5.2 R16.2 R29.2 U1.6 U1.9 U1.12 U9.3 U14.3 U15.3 U16_Vbat-3V32.1 | length 8
  Top Layer w0.254: 98.85,32.825 98.875,32.85 99.602,32.85 v1@99.627,32.825 ; v1(99.75,32.85) 99.75,32.825 100.375,32.2 101.375,32.2 101.702,31.873 101.702,31.348 101.875,31.175 ; 106.425,28.65 108.175,28.65 108.375,28.45 108.3,28.375 v1@108.3,27.75 ; v1@130.5,4 130.5,4.727 130.673,4.9 U9.3@130.85,4.9
  Bottom Layer w1: P69.9@117.15,3.2 P69.9@117.15,3.335
  other v1: 130.6,3.8 104.823,23.123 105.823,23.123 106.823,23.123 107.823,23.123 105.323,23.873 106.323,23.873 107.323,23.873 108.325,27.475
3V3-BSPD: "C43_Latch Circuit1.2" "C44_Latch Circuit1.2" "IC1_Latch Circuit1.5" "R54_Latch Circuit1.2" "U17_Latch Circuit1.5" C20.2 C22.2 C23.2 C24.2 C25.2 C42_Vbat-3V33.2 D6_Vbat-3V33.2 R19.2 R22.2 R23.2 R27.2 U4.1 U5.8 U6.5 U7.5 U8.5 U16_Vbat-3V33.1 | length 24.4
  Top Layer w0.254: 110.075,32.824 110.1,32.849 110.827,32.849 v1@110.852,32.824 ; v1(110.975,32.849) 110.975,32.824 111.6,32.199 112.6,32.199 112.927,31.872 112.927,31.347 113.1,31.174 ; 117.65,28.649 119.4,28.649 119.6,28.449 119.525,28.374 v1@119.525,27.749
  Top Layer w0.3: v1(73,52.075) 74.125,52.075 C20.2@74.2,52 73.9,51.7 U4.1@73.9,50.35 ; v1(75.475,46.5) R19.2@76.725,46.5 ; C24.2@78.325,47.625 78.35,47.625 C24.2@78.5,47.475 ; v1(79.2,46.625) 79.2,46.775 C24.2@78.5,47.475 ; U6.5@80.2,47.475 C24.2@78.5,47.475 ; U5.8@85.425,44.33 85.611,44.33 85.75,44.469 85.75,45.6 C22.2@86.075,45.925 v1(86.075,46.877) ; U7.5@87.175,51.225 89.65,51.225 v1(89.975,51.55) ; R27.2@89.15,38.9 v1(90.4,38.9) ; U8.5@90.65,47.525 92.25,47.525 C25.2@92.4,47.375 v1(92.4,48.775)
  other v1: 116.923,23.123 116.923,23.123 117.923,23.123 117.923,23.123 118.923,23.123 118.923,23.123 119.923,23.123 119.923,23.123 117.423,23.873 117.423,23.873 118.423,23.873 118.423,23.873 119.423,23.873 119.423,23.873 119.55,27.474
3V3-IMD: "C43_Latch Circuit4.2" "C44_Latch Circuit4.2" "IC1_Latch Circuit4.5" "R54_Latch Circuit4.2" "U17_Latch Circuit4.5" C42_Vbat-3V31.2 D6_Vbat-3V31.2 U16_Vbat-3V31.1 | length 6.7
  Top Layer w0.254: 121.225,32.825 121.25,32.85 121.977,32.85 v1@122.002,32.825 ; v1(122.125,32.85) 122.125,32.825 122.75,32.2 123.75,32.2 124.077,31.873 124.077,31.348 124.25,31.175 ; 128.8,28.65 130.55,28.65 130.75,28.45 130.675,28.375 v1@130.675,27.75
  other v1: 129.023,23.123 130.023,23.123 131.023,23.123 132.023,23.123 129.523,23.873 130.523,23.873 131.523,23.873 130.7,27.475
3V3-PDOC: "C43_Latch Circuit2.2" "C44_Latch Circuit2.2" "IC1_Latch Circuit2.5" "R54_Latch Circuit2.2" "U17_Latch Circuit2.5" C29.2 C30.2 C42_Vbat-3V34.2 D6_Vbat-3V34.2 R32.2 R33.2 R34.2 R35.2 R36.2 R37.2 U10.3 U11.14 U16_Vbat-3V34.1 | length 19.5
  Top Layer w0.254: 132.475,32.8 132.5,32.825 133.227,32.825 v1@133.252,32.8 ; v1(133.375,32.825) 133.375,32.8 134,32.175 135,32.175 135.327,31.848 135.327,31.323 135.5,31.15 ; 140.05,28.625 141.8,28.625 142,28.425 141.925,28.35 v1@141.925,27.725
  Top Layer w0.3: v1(73.7,10.35) 73.9,10.55 R34.2@74.7,10.55 ; v1(73.7,13.35) 73.9,13.55 R36.2@74.7,13.55 ; v1(73.7,14.85) 73.9,15.05 R37.2@74.7,15.05 ; v1(73.7,16.35) 73.9,16.55 R35.2@74.7,16.55 ; v1(75.9,19.25) 76.3,18.85 C29.2@76.3,18.05 77.57,18.05 78.4,17.22 U10.3@78.838,17.22 ; v1(76.65,27.95) 76.707,28.007 76.707,28.107 77.056,28.456 77.081,28.456 77.65,29.025 C30.2@77.65,29.05 ; U11.14@77.63,27.4 C30.2@77.63,29.005 ; R33.2@86.05,13.25 86.05,12.45 v1(86.25,12.25)
  other v1: 141.023,23.123 142.023,23.123 143.023,23.123 144.023,23.123 141.523,23.873 142.523,23.873 143.523,23.873 141.95,27.45
5V0-A: C34.2 C35.2 C36.2
+12: "R52_Latch Circuit1.2" "R52_Latch Circuit2.2" "R52_Latch Circuit3.2" "R52_Latch Circuit4.2" "R55_Latch Circuit1.2" "R55_Latch Circuit2.2" "R55_Latch Circuit3.2" "R55_Latch Circuit4.2" C41_Vbat-3V31.2 C41_Vbat-3V32.2 C41_Vbat-3V33.2 C41_Vbat-3V34.2 D3.2 F1.2 U16_Vbat-3V31.3 U16_Vbat-3V32.3 U16_Vbat-3V33.3 U16_Vbat-3V34.3 | length 72.6
  Top Layer w1: F1.2@99.85,8.803 99.85,11.022 ; U16_Vbat-3V32.3@100.45,21.75 100.45,19.2 98.25,17 98.25,12.622 99.85,11.022 ; U16_Vbat-3V33.3@112.55,21.75 112.55,18.836 111.964,18.25 110.336,18.25 109.75,17.664 109.75,15 107,12.25 ; U16_Vbat-3V34.3@136.65,21.75 136.65,18.986 135.914,18.25 135,18.25 134,17.25 134,13 133.25,12.25 107,12.25 ; 99.85,11.022 105.772,11.022 107,12.25
  other v1: 97.423,23.123 98.423,23.123 99.423,23.123 100.423,23.123 109.523,23.123 110.523,23.123 111.523,23.123 112.523,23.123 121.623,23.123 122.623,23.123 123.623,23.123 124.623,23.123 133.623,23.123 134.623,23.123 135.623,23.123 136.623,23.123 97.923,23.873 98.923,23.873 99.923,23.873 110.023,23.873 111.023,23.873 112.023,23.873 122.123,23.873 123.123,23.873 124.123,23.873 134.123,23.873 135.123,23.873 136.123,23.873
+USB_5: J2.1 U2.5
ADC.CONV: 
ADC.SCK: 
ADC.SDI: 
ADC.SDO: 
AGND: C31.1 C32.1 C33.1 C34.1 C35.1 C36.1 R41.1
AMS-Out: "R56_Latch Circuit3.2" P69.8 | length 28.2
  Bottom Layer w1: 103.575,30.2 103.575,20.651 108.05,16.176 108.05,12.75 P69.8@114.375,6.425
BMS-MCU: "IC1_Latch Circuit3.4" "Q2_Latch Circuit3.1" "Q3_Latch Circuit3.1" "R51_Latch Circuit3.2" "R53_Latch Circuit3.2" "U17_Latch Circuit3.1" | length 12.6
  Top Layer w0.254: 100.925,34.95 100.925,33.35 101.075,33.2 101.075,33.125 101.802,32.398 102.275,32.398 ; 102.825,31.175 102.652,31.348 102.652,32.021 102.275,32.398 ; 104.525,34.95 104.525,33.35 104.675,33.2 104.675,33.125 ; 106.425,31.15 106.425,32.248 106.275,32.398 105.402,32.398 104.675,33.125 ; 102.275,32.398 103.424,32.398 103.651,32.625 104.1,32.625 104.327,32.852 104.402,32.852 104.675,33.125
BMS-Ready: "IC1_Latch Circuit3.3" R29.1 | length 6.1
  Top Layer w0.254: R29.1@98.925,27.5 100.109,27.5 101.161,26.448 101.997,26.448 102.825,27.276 102.825,28.675
BMS.C\S\: U1.5
BMS.MISO: U1.3
BMS.MOSI: U1.2
BMS.SCK: U1.4
BOOT: R15.2
BSPD+_P: P5.7 R22.1 U4.3 U7.1
BSPD-_N: P5.9 R23.1 U4.4 U7.2
BSPD-MCU: "IC1_Latch Circuit1.4" "Q2_Latch Circuit1.1" "Q3_Latch Circuit1.1" "R51_Latch Circuit1.2" "R53_Latch Circuit1.2" "U17_Latch Circuit1.1" | length 12.6
  Top Layer w0.254: 112.15,34.949 112.15,33.349 112.3,33.199 112.3,33.124 113.027,32.397 113.5,32.397 ; 114.05,31.174 113.877,31.347 113.877,32.02 113.5,32.397 ; 115.75,34.949 115.75,33.349 115.9,33.199 115.9,33.124 ; 117.65,31.149 117.65,32.247 117.5,32.397 116.627,32.397 115.9,33.124 ; 113.5,32.397 114.649,32.397 114.876,32.624 115.325,32.624 115.552,32.851 115.627,32.851 115.9,33.124
BSPD-Out: "R56_Latch Circuit1.2" P69.10 | length 26.2
  Bottom Layer w1: 114.8,30.199 114.8,22.3 118.65,18.45 118.65,7.835 117.15,6.335 P69.10@117.15,6.2
BSPD-Ready: "IC1_Latch Circuit1.3" U5.7 | length 54
  Top Layer w0.254: U5.7@85.425,43.06 84.625,43.06 82.448,40.883 82.448,37.626 82.624,37.45 92.425,37.45 92.85,37.025 92.85,25.149 92.999,25 113.05,25 114.05,26 114.05,28.674
CAN1.Diff_N: D4.2 P5.6 R46.1 U14.6
CAN1.Diff_P: D4.1 P5.8 R45.1 U14.7
CAN1.LBK: R43.2 U14.5
CAN1.RX: U14.4
CAN1.TX: U14.1
CAN2.Diff_N: D5.2 P5.2 R48.1 U15.6
CAN2.Diff_P: D5.1 P5.4 R47.1 U15.7
CAN2.LBK: R44.2 U15.5
CAN2.RX: U15.4
CAN2.TX: U15.1
GND: "C43_Latch Circuit1.1" "C43_Latch Circuit2.1" "C43_Latch Circuit3.1" "C43_Latch Circuit4.1" "C44_Latch Circuit1.1" "C44_Latch Circuit2.1" "C44_Latch Circuit3.1" "C44_Latch Circuit4.1" "IC1_Latch Circuit1.2" "IC1_Latch Circuit1.6" "IC1_Latch Circuit2.2" "IC1_Latch Circuit2.6" "IC1_Latch Circuit3.2" "IC1_Latch Circuit3.6" "IC1_Latch Circuit4.2" "IC1_Latch Circuit4.6" "Q2_Latch Circuit1.2" "Q2_Latch Circuit2.2" "Q2_Latch Circuit3.2" "Q2_Latch Circuit4.2" "Q3_Latch Circuit1.2" "Q3_Latch Circuit2.2" "Q3_Latch Circuit3.2" "Q3_Latch Circuit4.2" "Q4_Latch Circuit1.2" "Q4_Latch Circuit2.2" "Q4_Latch Circuit3.2" "Q4_Latch Circuit4.2" "R51_Latch Circuit1.1" "R51_Latch Circuit2.1" "R51_Latch Circuit3.1" "R51_Latch Circuit4.1" "R53_Latch Circuit1.1" "R53_Latch Circuit2.1" "R53_Latch Circuit3.1" "R53_Latch Circuit4.1" "U17_Latch Circuit1.3" "U17_Latch Circuit2.3" "U17_Latch Circuit3.3" "U17_Latch Circuit4.3" C1.1 C2.1 C3.1 C4.1 C5.1 C6.1 C7.1 C8.1 C9.1 C10.1 C11.1 C12.1 C13.1 C14.1 C15.1 C16.1 C17.1 C18.1 C19.1 C20.1 C21.1 C22.1 C23.1 C24.1 C25.1 C26.1 C27.1 C28.1 C29.1 C30.1 C37.1 C38.1 C39.1 C40.1 C41_Vbat-3V31.1 C41_Vbat-3V32.1 C41_Vbat-3V33.1 C41_Vbat-3V34.1 C42_Vbat-3V31.1 C42_Vbat-3V32.1 C42_Vbat-3V33.1 C42_Vbat-3V34.1 D4.3 D5.3 J2.5 P1.3 P2.1 P3.1 P3.3 P3.5 P3.7 P3.9 P3.10 P5.5 P5.10 P69.4 P69.6 P69.7 Q1.2 R4.1 R6.1 R8.1 R10.1 R12.1 R14.1 R15.1 R18.1 R20.1 R21.1 R26.1 R30.1 R31.1 R38.1 R41.2 R42.1 R43.1 R44.1 R50_Vbat-3V31.1 R50_Vbat-3V32.1 R50_Vbat-3V33.1 R50_Vbat-3V34.1 R?.2 U1.7 U1.8 U1.13 U1.14 U2.2 U4.2 U5.4 U6.3 U7.3 U8.3 U9.1 U10.12 U11.7 U14.2 U14.8 U15.2 U15.8 U16_Vbat-3V31.2 U16_Vbat-3V31.4 U16_Vbat-3V32.2 U16_Vbat-3V32.4 U16_Vbat-3V33.2 U16_Vbat-3V33.4 U16_Vbat-3V34.2 U16_Vbat-3V34.4 Y1.2 Y1.4 | length 92.5
  Top Layer w0.254: 98.85,31.525 98.975,31.4 v1(99.725,31.4) 99.819,31.4 100.044,31.175 100.925,31.175 100.925,30.225 ; v1(101.675,27.225) 101.675,27.319 101.875,27.519 101.875,28.675 ; v1(101.975,34.5) 102.652,34.5 102.825,34.673 102.825,34.95 ; 102.675,33.2 102.675,33.227 102.948,33.5 v1@103.475,33.5 ; 106.275,33.2 107.175,33.2 v1(107.425,33.45) ; v1(107.775,30.95) 108.052,30.673 108.052,30.048 108.35,29.75 108.375,29.75 ; 110.075,31.524 110.2,31.399 v1(110.95,31.399) 111.044,31.399 111.269,31.174 112.15,31.174 112.15,30.224 ; v1(112.9,27.224) 112.9,27.317 113.1,27.517 113.1,28.674 ; v1(113.2,34.499) 113.877,34.499 114.05,34.672 114.05,34.949 ; 113.9,33.199 113.9,33.226 114.173,33.499 v1@114.7,33.499 ; 117.5,33.199 118.4,33.199 v1(118.65,33.449) ; v1(119,30.949) 119.277,30.672 119.277,30.047 119.575,29.749 119.6,29.749 ; 121.225,31.525 121.35,31.4 v1(122.1,31.4) 122.194,31.4 122.419,31.175 123.3,31.175 123.3,30.225 ; v1(124.05,27.225) 124.05,27.319 124.25,27.519 124.25,28.675 ; v1(124.35,34.5) 125.027,34.5 125.2,34.673 125.2,34.95 ; 125.05,33.2 125.05,33.227 125.323,33.5 v1@125.85,33.5 ; 128.65,33.2 129.55,33.2 v1(129.8,33.45) ; v1(130.15,30.95) 130.427,30.673 130.427,30.048 130.725,29.75 130.75,29.75 ; 132.475,31.5 132.6,31.375 v1(133.35,31.375) 133.444,31.375 133.669,31.15 134.55,31.15 134.55,30.2 ; U9.1@133.25,3.945 133.45,3.945 134.325,3.07 v1(134.325,2.975) ; v1(135.3,27.2) 135.3,27.294 135.5,27.494 135.5,28.65 ; v1(135.6,34.475) 136.277,34.475 136.45,34.648 136.45,34.925 ; 136.3,33.175 136.3,33.202 136.573,33.475 v1@137.1,33.475 ; v1(138.4,9.8) 139.637,9.8 R31.1@139.75,9.913 ; R31.1@139.825,9.913 141.287,9.913 141.575,9.625 Q1.2@141.975,9.625 ; 139.9,33.175 140.8,33.175 v1(141.05,33.425) ; v1(141.4,30.925) 141.677,30.648 141.677,30.023 141.975,29.725 142,29.725
  Top Layer w0.3: v1(73.65,11.85) 73.85,12.05 C28.1@74.65,12.05 ; v1(73.7,17.85) 73.9,18.05 C29.1@74.7,18.05 ; U4.2@73.9,49.4 v1(75.15,49.4) ; v1(74,43.475) R20.1@75.25,43.475 ; v1(75.5,40.425) R21.1@76.75,40.425 ; C20.1@75.8,52 v1(77.05,52) ; v1(77.325,49.45) 78.1,49.45 C24.1@78.325,49.225 ; C21.1@78.25,45 v1(78.25,46.25) ; C30.1@79.25,29.05 80.55,29.05 v1(80.65,28.95) ; v1(80.625,39.27) U5.4@80.625,40.52 ; v1(81.5,49.2) 81.557,49.257 82.582,49.257 U6.3@82.7,49.375 ; v1(82.591,16.95) 82.672,16.95 82.942,17.22 U10.12@84.262,17.22 ; v1(83.225,38.9) C27.1@84.475,38.9 ; C22.1@84.3,45.75 v1(84.3,47) ; U7.3@84.675,49.325 84.975,49.325 85.125,49.175 85.125,48.775 v1(85.4,48.5) ; U11.7@85.25,22.15 85.375,22.025 85.375,21.225 v1@85.65,20.95 ; v1(85.915,18.838) 85.915,18.757 86.05,18.622 R38.1@86.05,17.75 ; v1(88.15,44.619) U8.3@88.15,45.625 ; C23.1@88.925,49.475 89.25,49.15 89.719,49.15 89.819,49.05 v1(89.9,49.05) ; R26.1@89.15,40.65 v1(90.4,40.65) ; C26.1@89.15,43.475 89.15,43.5 v1(90.05,44.4) ; v1(92.125,44.6) 92.4,44.875 C25.1@92.4,45.775 ; v1(102.75,19.85) U16_Vbat-3V32.2@102.75,21.75 ; v1(103.875,31.75) 103.956,31.75 104.081,31.625 104.375,31.625 104.525,31.475 104.525,31.15 ; v1(114.85,19.85) U16_Vbat-3V33.2@114.85,21.75 ; v1(115.1,31.749) 115.181,31.749 115.306,31.624 115.6,31.624 115.75,31.474 115.75,31.149 ; C42_Vbat-3V33.1@119.25,20.575 120.125,20.575 v1(120.35,20.35) ; v1(126.25,31.75) 126.331,31.75 126.456,31.625 126.75,31.625 126.9,31.475 126.9,31.15 ; v1(126.95,19.85) U16_Vbat-3V31.2@126.95,21.75 ; v1(137.5,31.725) 137.581,31.725 137.706,31.6 138,31.6 138.15,31.45 138.15,31.125 ; v1(138.95,19.85) U16_Vbat-3V34.2@138.95,21.75
  Top Layer w0.4: v1(105.575,34.575) 106.252,34.575 106.425,34.748 ; 106.425,34.95 106.425,34.748 ; v1(107.275,34.575) 106.598,34.575 106.425,34.748 ; v1(116.8,34.574) 117.477,34.574 117.65,34.747 ; 117.65,34.949 117.65,34.747 ; v1(118.5,34.574) 117.823,34.574 117.65,34.747 ; v1(127.95,34.575) 128.627,34.575 128.8,34.748 ; 128.8,34.95 128.8,34.748 ; v1(129.65,34.575) 128.973,34.575 128.8,34.748 ; v1(139.2,34.55) 139.877,34.55 140.05,34.723 ; 140.05,34.925 140.05,34.723 ; v1(140.9,34.55) 140.223,34.55 140.05,34.723
  Bottom Layer w1: P69.7@114.15,3.2 P69.7@114.15,3.335
  other v1: 100.123,13.523 101.123,13.523 102.123,13.523 103.123,13.523 104.123,13.523 105.123,13.523 112.223,13.523 113.223,13.523 114.223,13.523 115.223,13.523 116.223,13.523 117.223,13.523 124.323,13.523 125.323,13.523 126.323,13.523 127.323,13.523 128.323,13.523 129.323,13.523 136.323,13.523 137.323,13.523 138.323,13.523 139.323,13.523 140.323,13.523 141.323,13.523 85.643,20.957 137.25,33.65 103.625,33.675 114.85,33.674 126,33.675
I-Sig: R24.2 R39.1
IMD-In: P69.5 R28.2 | length 8.7
  Top Layer w0.254: P69.5@111.15,3.2 112.5,4.55 112.5,9.3 113.014,9.814 113.163,9.814 113.95,10.6 R28.2@113.95,10.675
IMD-Out: "R56_Latch Circuit4.2" P69.12 | length 26.4
  Bottom Layer w1: P69.12@120.15,6.2 120.15,8.475 120.425,8.75 120.425,16.6 125.95,22.125 125.95,30.2
IMU-MCU: "IC1_Latch Circuit4.4" "Q2_Latch Circuit4.1" "Q3_Latch Circuit4.1" "R51_Latch Circuit4.2" "R53_Latch Circuit4.2" "U17_Latch Circuit4.1" | length 12.6
  Top Layer w0.254: 123.3,34.95 123.3,33.35 123.45,33.2 123.45,33.125 124.177,32.398 124.65,32.398 ; 125.2,31.175 125.027,31.348 125.027,32.021 124.65,32.398 ; 126.9,34.95 126.9,33.35 127.05,33.2 127.05,33.125 ; 128.8,31.15 128.8,32.248 128.65,32.398 127.777,32.398 127.05,33.125 ; 124.65,32.398 125.799,32.398 126.026,32.625 126.475,32.625 126.702,32.852 126.777,32.852 127.05,33.125
NetC1_2: C1.2 T1.5
NetC2_2: C2.2 R1.1 R2.2
NetC15_2: C15.2 R17.1 Y1.3
NetC19_2: C19.2
NetC21_2: C21.2 R19.1 R20.2 U5.2 | length 5.5
  Top Layer w0.3: R19.1@76.725,44.9 76.85,44.775 R20.2@76.85,43.475 76.85,43.4 77.19,43.06 U5.2@80.625,43.06
NetC26_2: C26.2 R25.1 U5.6 | length 3.7
  Top Layer w0.3: U5.6@85.425,41.79 86.306,41.79 86.466,41.95 R25.1@87.55,41.95 C26.2@87.55,43.475
NetC27_2: C27.2 R26.2 R27.1 U5.5 | length 5.8
  Top Layer w0.3: C27.2@86.075,38.9 85.999,38.976 85.999,40.381 85.861,40.52 U5.5@85.425,40.52 87.455,40.52 R26.2@87.55,40.425 R27.1@87.55,38.9
NetC28_2: C28.2 R37.1 R38.2 U10.5 U10.7 U10.9 U10.11 | length 21.7